# Altium PCB LMQ644_test_PCB.PcbDoc
Units mil, origin at the board's own origin, x right, y up, seen from the top; angles counter-clockwise.
Board outline 2650 x 2150 mil, 4 copper layers (1-Top, 2-GND1, 3-GND2, 4-Bottom), stack 33.556 mil thick; 61 components, 35 nets, 185 pads, 68 vias.
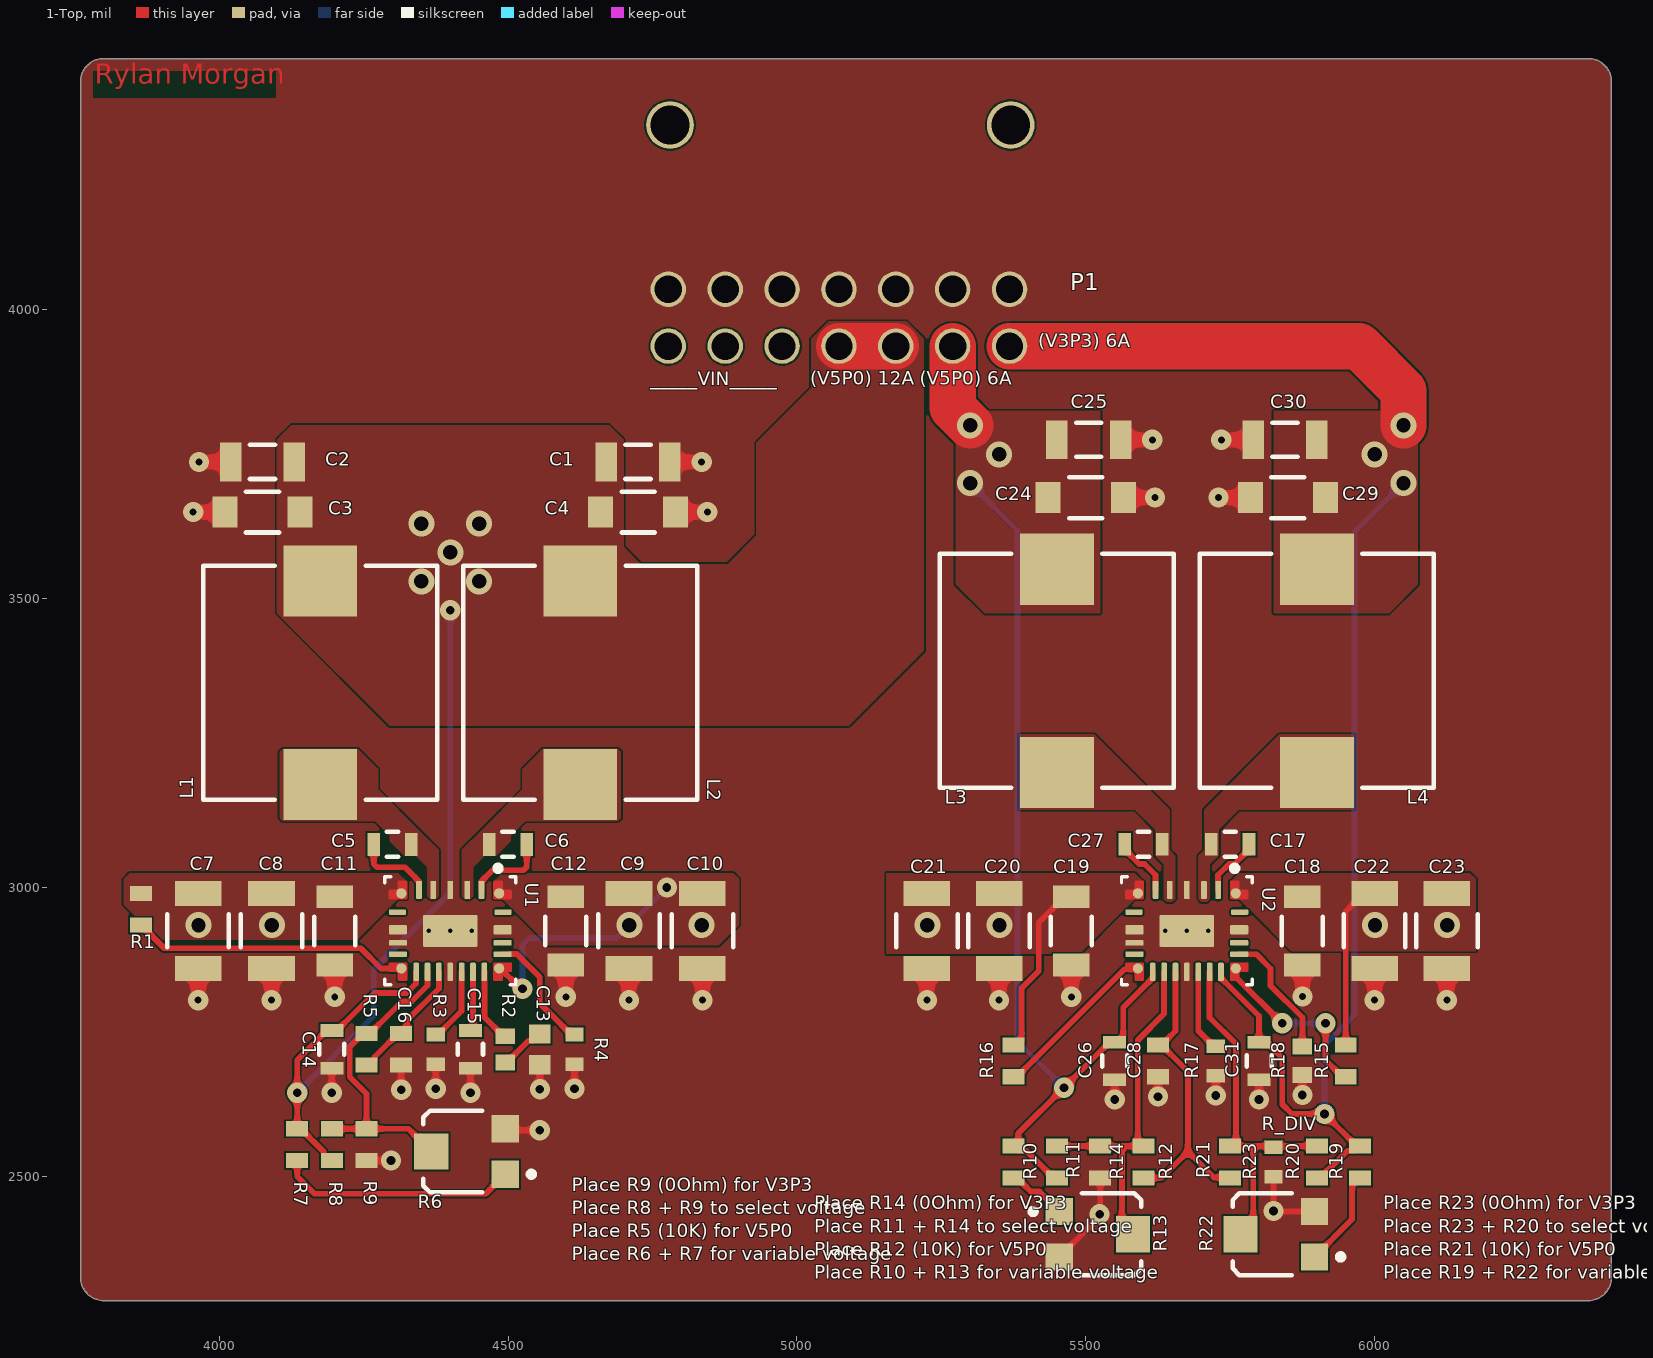
[diagram p0: 1-Top view]
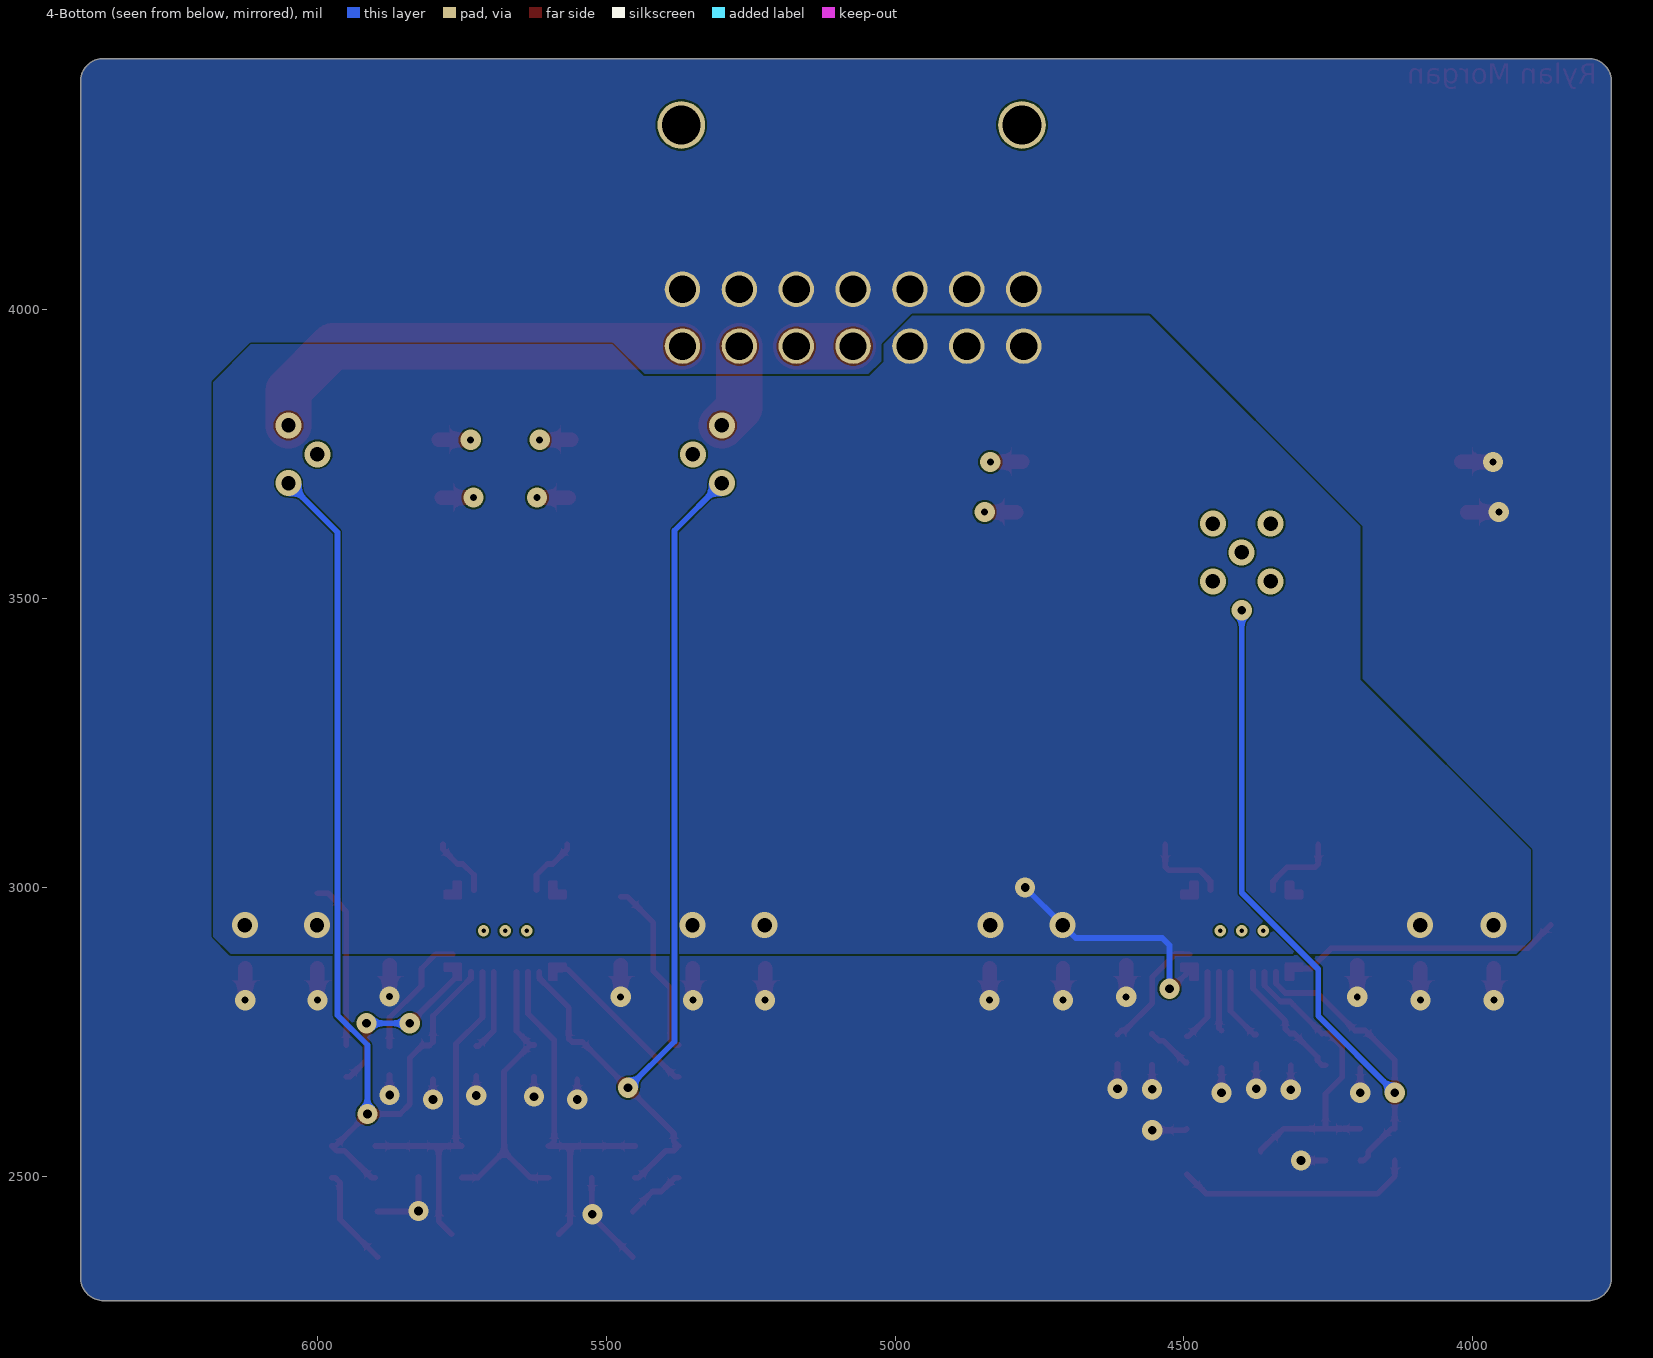
[diagram p1: 4-Bottom view, seen from below]
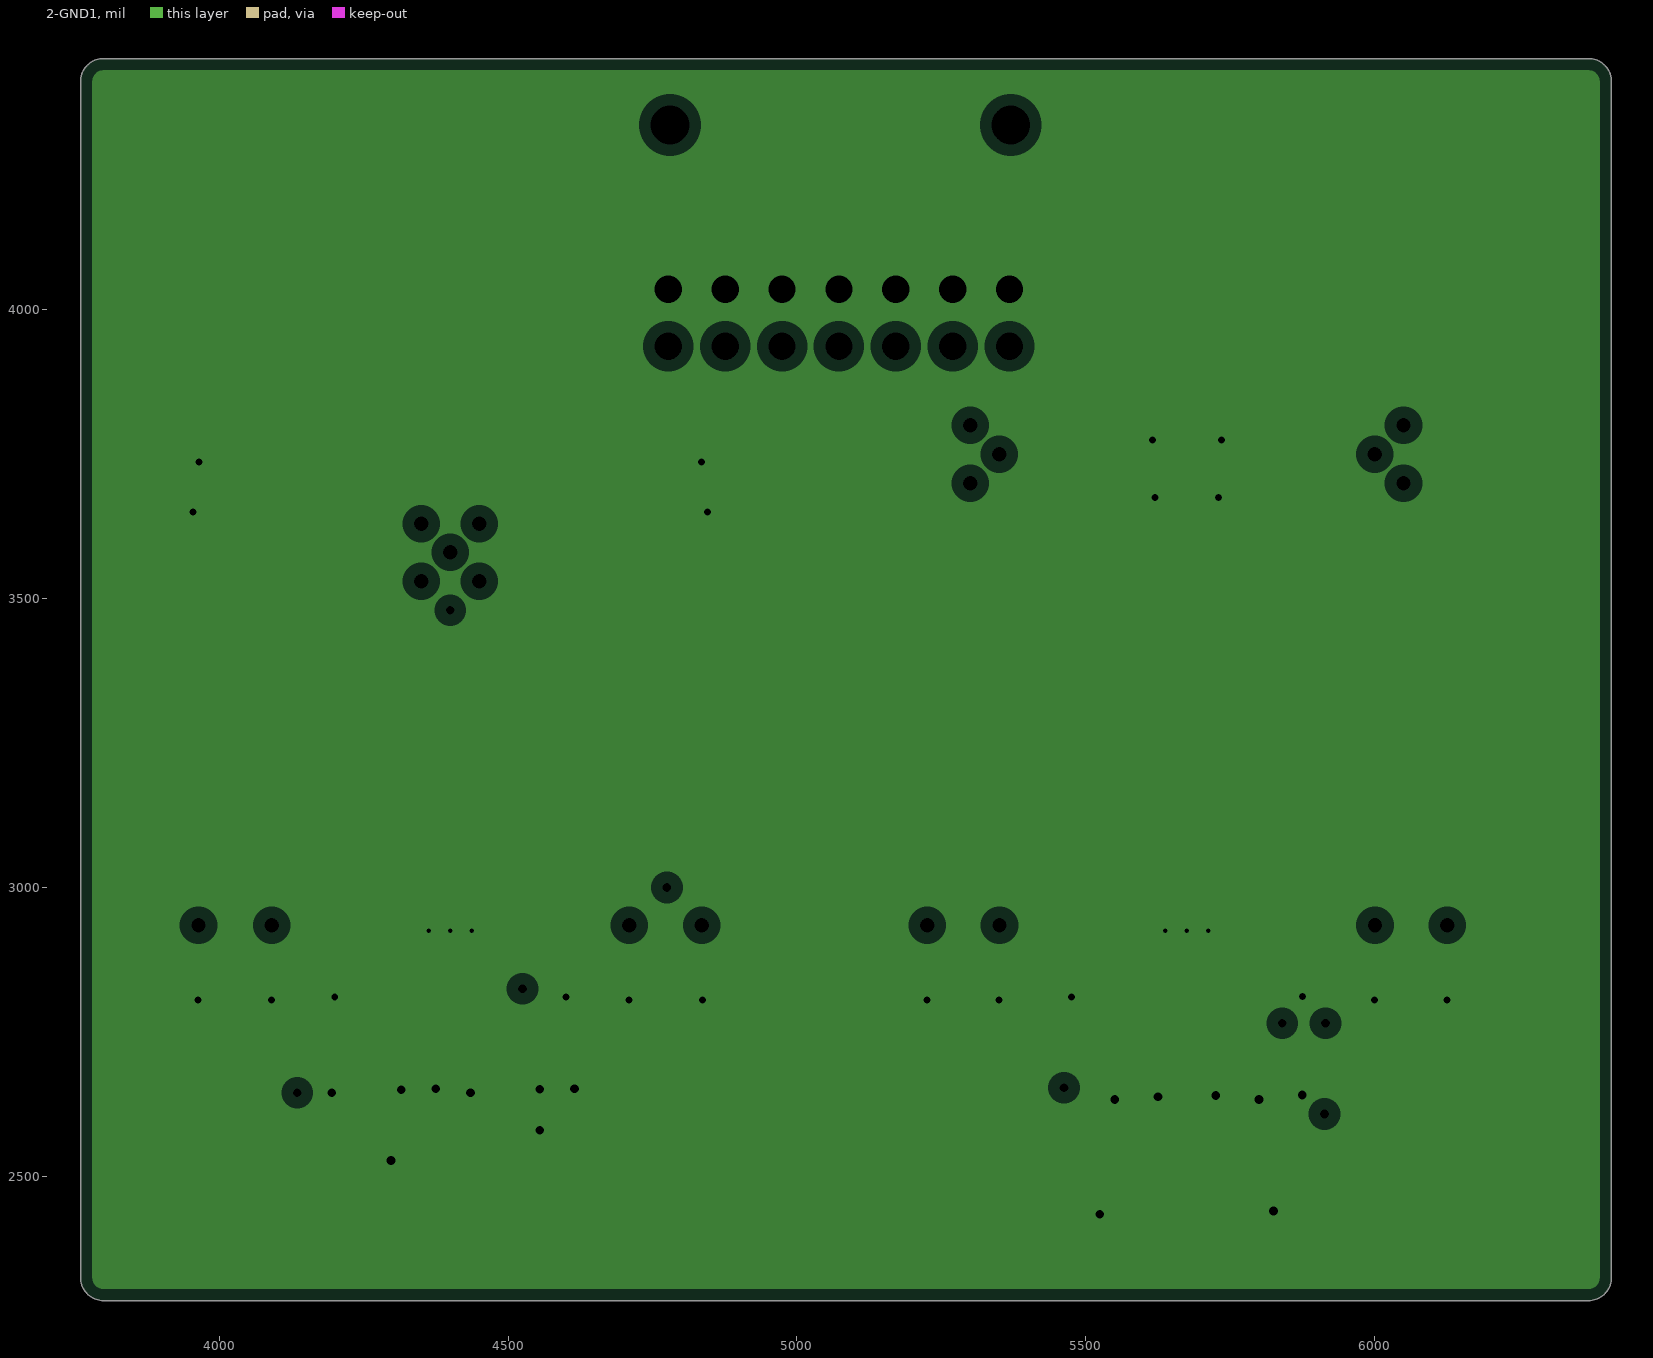
[diagram p2: 2-GND1, clearances drawn from the general rule]
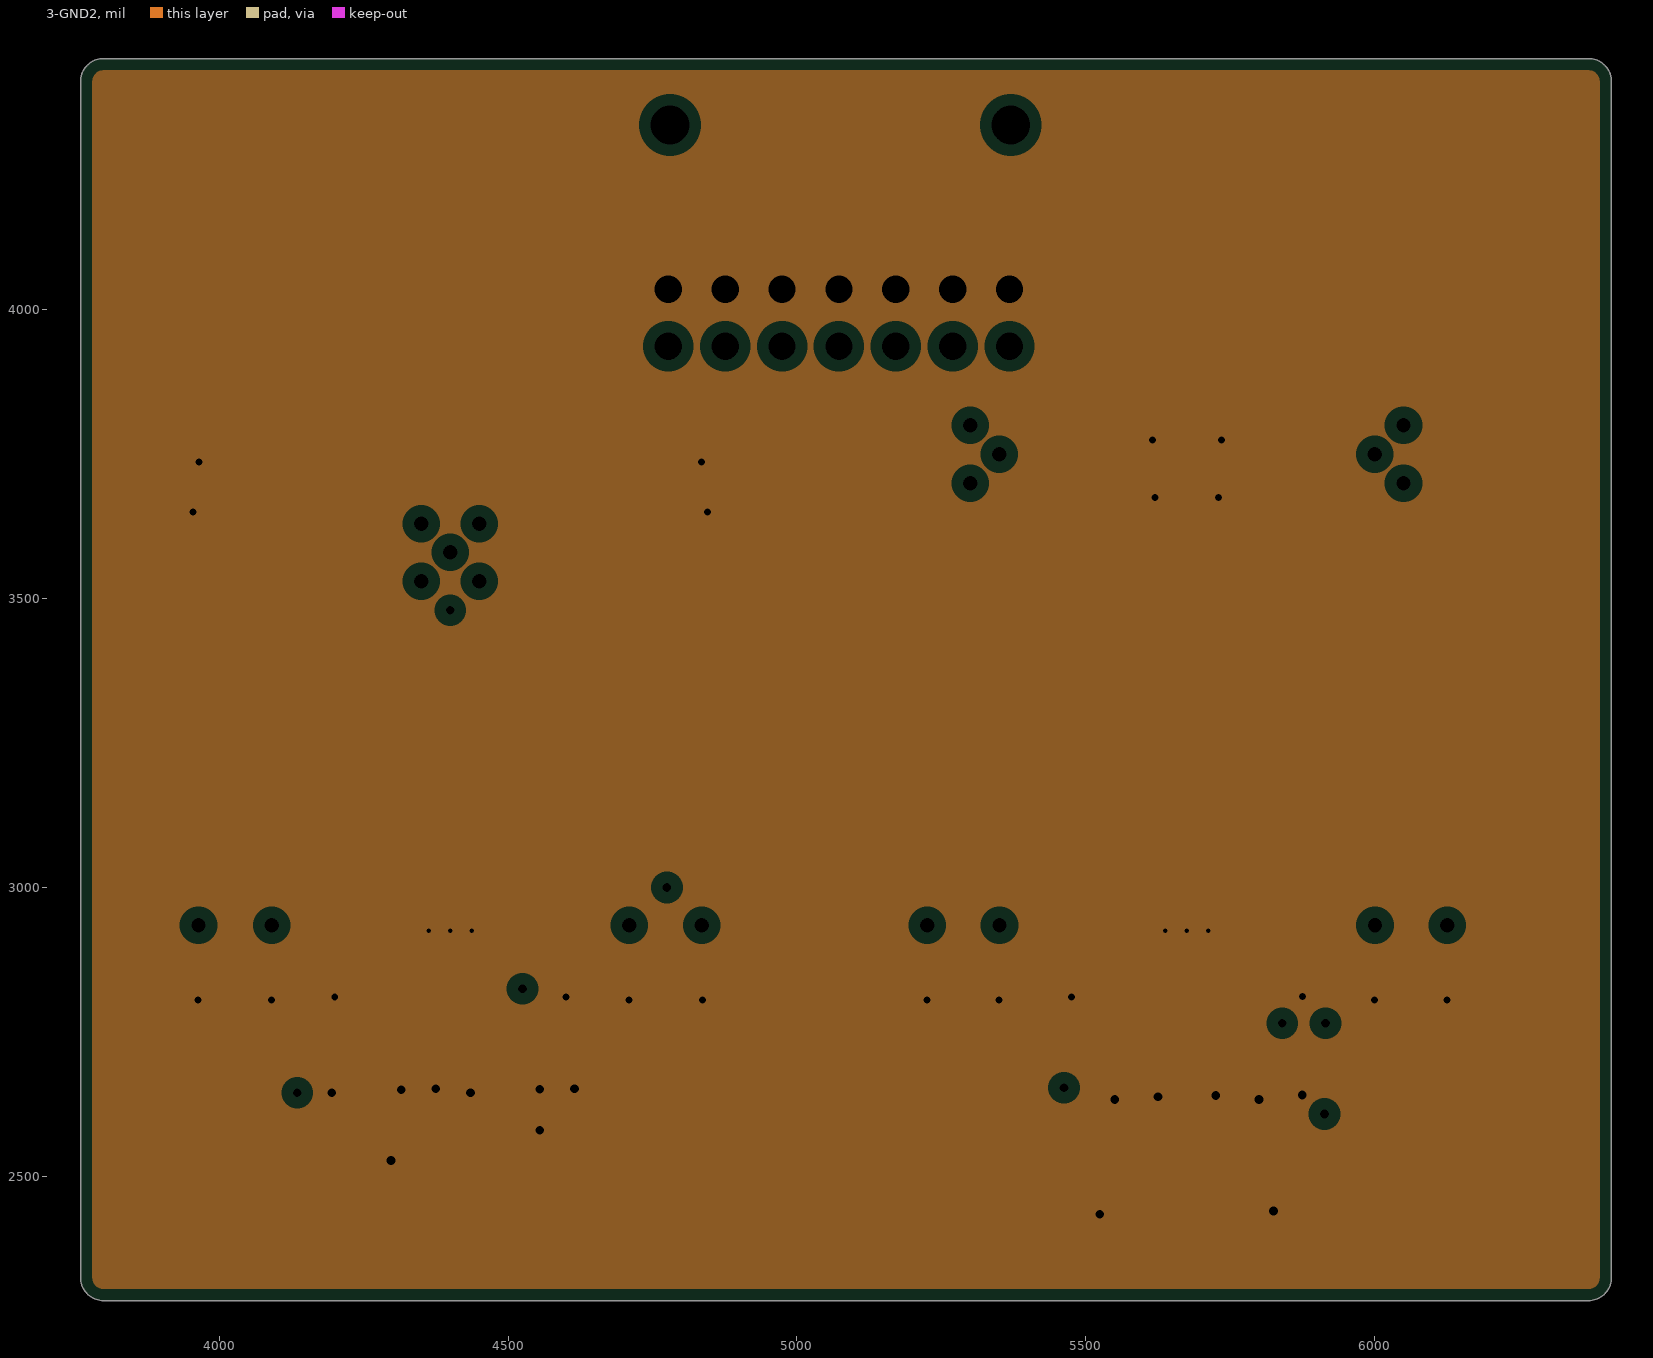
[diagram p3: 3-GND2, clearances drawn from the general rule]
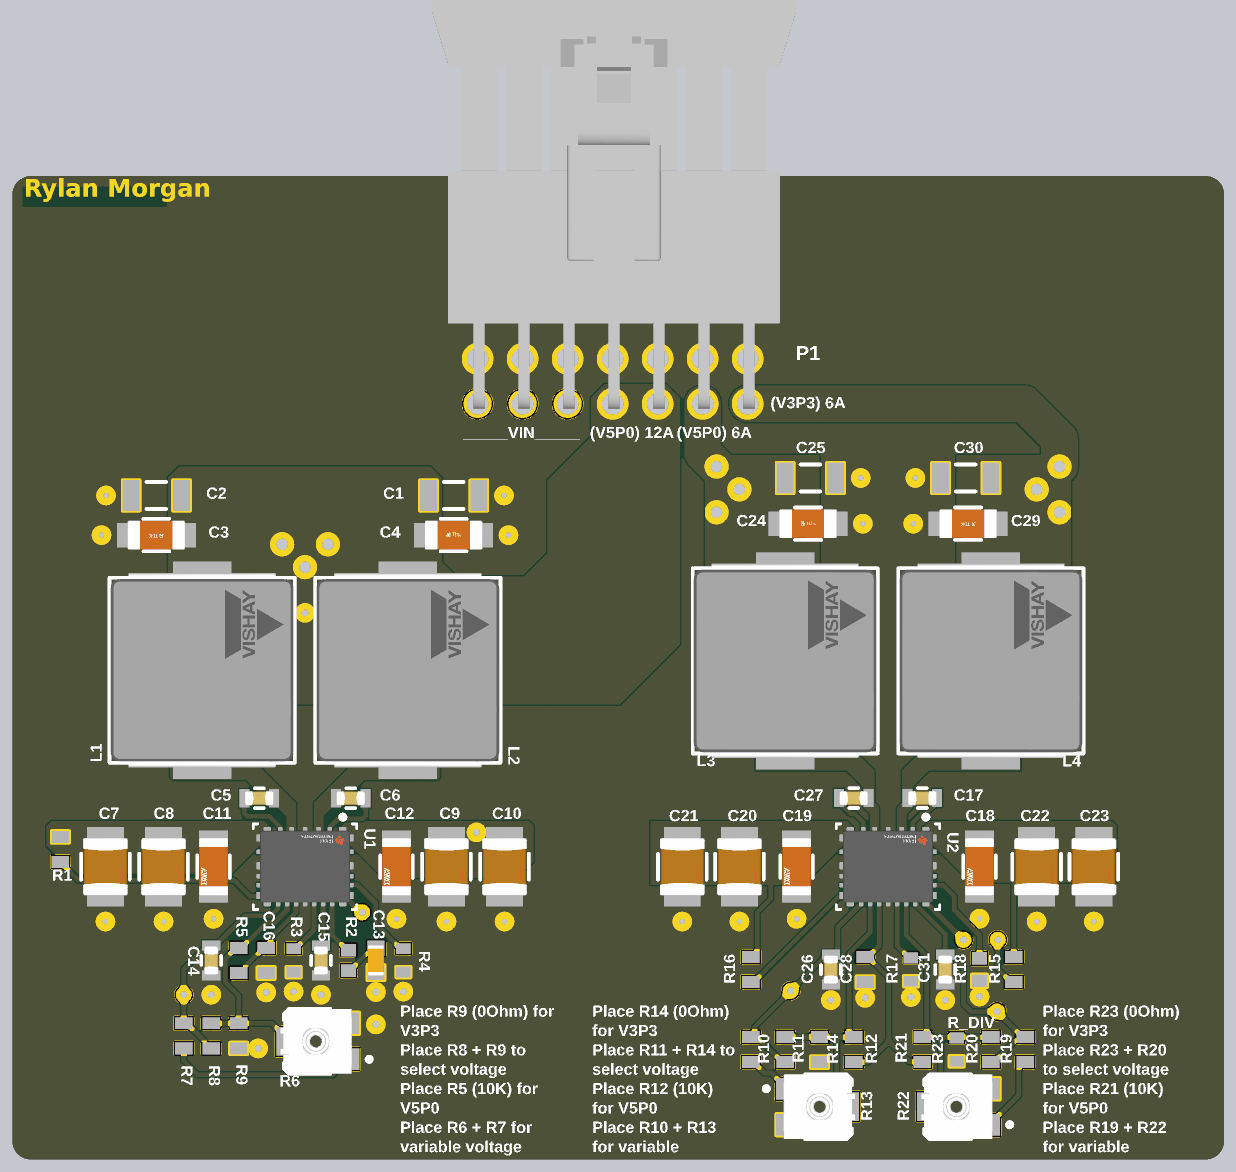
[diagram p4: 3D render of the assembled board from above, using the file's embedded part models]

## Layer stack, top to bottom
Top Solder: solder mask 0.4, Solder Resist, Dk 3.5
1-Top: signal copper 1.4
Dielectric 1: dielectric 12.6, FR-4, Dk 4.8
2-GND1: plane copper 1.378, net GND
Dielectric 2: prepreg 2.8, PP-006, Dk 4.1
3-GND2: plane copper 1.378, net GND
Dielectric3: dielectric 12.6, FR-4, Dk 4.8
4-Bottom: signal copper 1.4
Bottom Solder: solder mask 0.4, Solder Resist, Dk 3.5

## Board outline
3760,2325 3760,4395 cw(c3800,4395) 3800,4435 6370,4435 cw(c6370,4395) 6410,4395 6410,2325 cw(c6370,2325) 6370,2285 3800,2285 cw(c3800,2325)

## Design rules (kind name [scope] priority, off if disabled: settings)
Clearance Clearance_1 [All] p1: gap=3 ignorepadtopadclearanceinfootprint=FALSE except(0: Arc-Hole Track-Hole SMDPad-Hole THPad-Hole Via-Hole Fill-Hole Poly-Hole Region-Hole Text-Hole Hole-Hole)
Clearance Clearance_2 [OnMid vs OnMid] p2: gap=10 ignorepadtopadclearanceinfootprint=FALSE except(0: Arc-Hole Track-Hole SMDPad-Hole THPad-Hole Via-Hole Fill-Hole Poly-Hole Region-Hole Text-Hole)
Clearance Clearance_3 [(ExistsOnLayer('1-Top') Or ExistsOnLayer('4-Bottom')) vs (ExistsOnLayer('1-Top') Or ExistsOnLayer('4-Bottom'))] p3: gap=10 ignorepadtopadclearanceinfootprint=FALSE except(0: Arc-Hole Track-Hole SMDPad-Hole THPad-Hole Via-Hole Fill-Hole Poly-Hole Region-Hole Text-Hole)
Clearance [All] p4: gap=10 ignorepadtopadclearanceinfootprint=FALSE except(0: Arc-Hole Track-Hole SMDPad-Hole THPad-Hole Via-Hole Fill-Hole Poly-Hole Region-Hole Text-Hole)
PlaneClearance [All] p1: clearance=20
PlaneConnect [All] p1: planeconnectstyle=Relief reliefexpansion=20 reliefentries=4 reliefconductorwidth=10 reliefairgap=10
PolygonConnect [All] p1: connectstyle=Direct reliefconductorwidth=10 reliefentries=4 polygonreliefangle="90 Angle" airgapwidth=10
RoutingVias RoutingViaStyle_1 [All] p1: holewidth=15 width=35 viastyle="Through Hole" minholewidth=10 minwidth=10 maxholewidth=30 maxwidth=50
RoutingVias [All] p2: holewidth=28 width=50 viastyle="Through Hole" minholewidth=28 minwidth=50 maxholewidth=28 maxwidth=50
SolderMaskExpansion [All] p1: expansion=4 istentingtop=FALSE
Width MaxMinWidth_1 [All] p1: maxlimit=100 minlimit=10 preferedwidth=10 minimp=50.000000 maximp=50.000000 favimp=50.000000
Width [All] p2: maxlimit=10 minlimit=10 preferedwidth=10
28 further rules are at their usual default settings.

## Components (designator, comment, footprint, x,y, rotation, side; value= is the part's Value field where it differs from the comment)
C1 "22uF" CAPC1206(3216)190_L 4725,3736.7 r180 top (schematic designator C73)
C2 "22uF" CAPC1206(3216)190_L 4075,3736.7 r0 top (schematic designator C68)
C3 "47uF" FP-C3216-160-0_2-MFG 4075,3650 r180 top (schematic designator C67)
C4 "47uF" FP-C3216-160-0_2-MFG 4725,3650 r0 top (schematic designator C72)
C5 "100nF" FP-CGA3E-0_3-0_1-IPC_C 4300,3074.7 r0 top (schematic designator C16)
C6 "100nF" FP-CGA3E-0_3-0_1-IPC_C 4500,3074.7 r180 top (schematic designator C70)
C7 "10uF" FP-GRM32-MFG 3963.6,2925 r270 top (schematic designator C63)
C8 "10uF" FP-GRM32-MFG 4090.66,2925 r270 top (schematic designator C64)
C9 "10uF" FP-GRM32-MFG 4709.34,2925 r270 top (schematic designator C66)
C10 "10uF" FP-GRM32-MFG 4836.4,2925 r270 top (schematic designator C65)
C11 "100nF" FP-1206-L_3_2_0_2-W_1_6_0-MFG 4200,2925 r270 top (schematic designator C62)
C12 "100nF" FP-1206-L_3_2_0_2-W_1_6_0-MFG 4600,2925 r270 top (schematic designator C18)
C13 "2.2nF" CAPC1608X90X35NL10T15 4555.13,2720 r270 top (schematic designator C80)
C14 "100nF" FP-CGA3E-0_3-0_1-IPC_C 4195,2720 r90 top (schematic designator C69)
C15 "100nF" FP-CGA3E-0_3-0_1-IPC_C 4435,2720 r270 top (schematic designator C79)
C16 "1uF" 0603 4315,2720 r270 top (schematic designator C71)
C17 "100nF" FP-CGA3E-0_3-0_1-IPC_C 5600,3075 r0 top
C18 "100nF" FP-1206-L_3_2_0_2-W_1_6_0-MFG 5875,2925 r270 top
C19 "100nF" FP-1206-L_3_2_0_2-W_1_6_0-MFG 5475,2925 r270 top
C20 "10uF" FP-GRM32-MFG 5350,2925 r270 top
C21 "10uF" FP-GRM32-MFG 5225,2925 r270 top
C22 "10uF" FP-GRM32-MFG 6000,2925 r270 top
C23 "10uF" FP-GRM32-MFG 6125,2925 r270 top
C24 "47uF" FP-C3216-160-0_2-MFG 5500,3675 r0 top
C25 "22uF" CAPC1206(3216)190_L 5505.12,3775 r180 top
C26 "100nF" FP-CGA3E-0_3-0_1-IPC_C 5550,2700 r90 top
C27 "100nF" FP-CGA3E-0_3-0_1-IPC_C 5750,3075 r180 top
C28 "1uF" 0603 5625,2700 r270 top
C29 "47uF" FP-C3216-160-0_2-MFG 5850,3675 r180 top
C30 "22uF" CAPC1206(3216)190_L 5844.88,3775 r0 top
C31 "100nF" FP-CGA3E-0_3-0_1-IPC_C 5800,2700 r90 top
L1 "6.8uH" FP-IHLP-4040DZ-FP_3_124x3-MFG 4175,3354.61 r90 top
L2 "6.8uH" FP-IHLP-4040DZ-FP_3_124x3-MFG 4625,3354.61 r90 top (schematic designator L3)
L3 "6.8uH" FP-IHLP-4040DZ-FP_3_124x3-MFG 5450,3375 r90 top
L4 "6.8uH" FP-IHLP-4040DZ-FP_3_124x3-MFG 5900,3375 r90 top
P1 "14-Pin 2-Row Nano-Fit Right Angle" "MOLEX NANO-FIT 2X7 - Right Angle" 5368.03,4035.55 r180 top
R1 "10K" 0603 3865,2962.46 r90 top (schematic designator R5)
R2 "11K" RESC1609X50X30LL10T20 4495,2720 r270 top (schematic designator R32)
R3 "39K2" RESC1608X55X25LL10T15 4375,2720 r90 top (schematic designator R38)
R4 "56K2" RESC1608X55X25LL10T15 4615,2720 r90 top (schematic designator R42)
R5 "10K" 0603 4255,2720 r90 top (schematic designator R27)
R6 "DNP" BOUR-TC33X-2_V 4424.13,2543.13 r180 top (schematic designator R52)
R7 "DNP" 0603 4135,2555 r270 top (schematic designator R53)
R8 "DNP" 0603 4195,2555 r90 top (schematic designator R50)
R9 "DNP" 0603 4255,2555 r270 top (schematic designator R51)
R10 "DNP" 0603 5375,2525 r270 top
R11 "DNP" 0603 5450,2525 r90 top
R12 "10K" 0603 5600,2525 r90 top
R13 "DNP" BOUR-TC33X-2_V 5525,2400 r0 top
R14 "DNP" 0603 5525,2525 r270 top
R15 "10K" 0603 5950,2700 r90 top
R16 "10K" 0603 5375,2700 r90 top
R17 "39K2" RESC1608X55X25LL10T15 5725,2700 r90 top
R18 "121K" RESC1608X55X30LL15T15 5875,2700 r90 top
R19 "DNP" 0603 5975,2525 r270 top
R20 "DNP" 0603 5900,2525 r90 top
R21 "DNP" 0603 5750,2525 r270 top
R22 "DNP" BOUR-TC33X-2_V 5825,2400 r180 top
R23 "0R" RESC1608X55X25LL10T15 5825,2525 r90 top
U1 "LMQ644A2QRXARQ1" RXA0024A-MFG 4400,2925 r270 top (schematic designator U3)
U2 "LMQ644A2QRXARQ1" RXA0024A-MFG 5675,2925 r270 top

## Footprints (in the part's own frame and the unit in brackets; to place one, negate y for a bottom-side part, rotate by r counter-clockwise, add the part's x,y. Pads: shape width x height; smd on the part's side, far side on the other; paste and mask are expansions set on the pad)
0603 [mil]
  rect 26x38 smd: 1(-27.5,0) 2(27.5,0)
  body extent 0,0 10,10, height 10
BOUR-TC33X-2_V [mm] "SMD, 3-Leads, Body 3.8x3.6mm"
  rect 1.2x1.2 smd: 1(-1.8,1) 3(-1.8,-1)
  rect 1.5x1.6 smd: 2(1.45,0)
  silkscreen extent -3.08,-1.8 1.8,1.8, body extent -2,-1.8 1.96,1.8, height 1.15
CAPC1206(3216)190_L [mm] "Chip Capacitor, Body 3.2x1.6mm, Height 1.9mm, IPC High Density"
  rect 0.95x1.7 smd: 1(-1.4,0) 2(1.4,0)
  silkscreen extent -0.55,-0.75 0.55,0.75, body extent -1.7,-0.9 1.7,0.9, height 1.9
CAPC1608X90X35NL10T15 [mm] "Chip Capacitor, 2-Leads, Body 1.7x0.9mm, IPC Medium Density"
  rect 0.85x0.95 smd: 1(-0.675,0) 2(0.675,0)
  body extent -0.85,-0.45 0.85,0.45, height 0.9
FP-1206-L_3_2_0_2-W_1_6_0-MFG [mm]
  rect 1x1.6 smd paste+0 mask+0: 1(-1.5,0) 2(1.5,0)
  silkscreen extent -0.63,-0.9 0.63,0.9, body extent -2.1,-1 2.1,1, height 0.25
FP-C3216-160-0_2-MFG [mm]
  rect 1.1x1.35 smd paste+0 mask+0: 1(-1.65,0) 2(1.65,0)
  silkscreen extent -0.72,-0.9 0.72,0.9, body extent -2.3,-1 2.3,1, height 0.25
FP-CGA3E-0_3-0_1-IPC_C [mm]
  rect 0.556x1.006 smd paste+0 mask+0: 1(-0.825,0) 2(0.825,0)
  silkscreen extent -0.25,-0.55 0.25,0.55, body extent -1.2,-0.65 1.2,0.65, height 0.25
FP-GRM32-MFG [mm]
  rect 1.1x2.05 smd paste+0 mask+0: 1(-1.65,0) 2(1.65,0)
  silkscreen extent -0.72,-1.35 0.72,1.35, body extent -2.3,-1.45 2.3,1.45, height 0.25
FP-IHLP-4040DZ-FP_3_124x3-MFG [mil]
  rect 122.99x127.99 smd paste+0 mask+0: 1(-176,0) 2(176,0)
  silkscreen extent -202,-202 202,202, body extent -241,-206 241,206, height 10
"MOLEX NANO-FIT 2X7 - Right Angle" [mm]
  round 1.56 hole 1.2: 1(15,2.5) 2(12.5,2.5) 3(10,2.5) 4(7.5,2.5) 5(5,2.5) 6(2.5,2.5) 7(0,2.5) 8(15,0) 9(12.5,0) 10(10,0) 11(7.5,0) 12(5,0) 13(2.5,0) 14(0,0)
  round 2.1 hole 1.7: ""(-0.05,-7.225) ""(14.925,-7.225)
  body extent -2.68,-26.05 17.53,2.78, height 10.21
RESC1608X55X25LL10T15 [mm] "Chip Resistor, 2-Leads, Body 1.60x0.80mm, IPC High Density"
  rect 0.6x0.8 smd: 1(-0.65,0) 2(0.65,0)
  body extent -0.85,-0.45 0.85,0.45, height 0.55
RESC1608X55X30LL15T15 [mm] "Chip Resistor, 2-Leads, Body 1.60x0.80mm, IPC High Density"
  rect 0.7x0.85 smd: 1(-0.625,0) 2(0.625,0)
  body extent -0.87,-0.48 0.87,0.48, height 0.55
RESC1609X50X30LL10T20 [mm] "Chip Resistor, 2-Leads, Body 1.55x0.85mm, IPC High Density"
  rect 0.7x0.85 smd: 1(-0.575,0) 2(0.575,0)
  body extent -0.82,-0.48 0.82,0.48, height 0.5
RXA0024A-MFG [mm]
  round 0.45 smd paste+0 mask+0: 1(-1.65,2.15) 7(-1.65,-2.15) 12(1.65,-2.15) 20(1.65,2.15)
  rrect40% 0.8x0.25 smd paste+0 mask+0: 2(-1.8,1.375) 3(-1.8,0.75) 4(-1.8,0) 5(-1.8,-0.75) 6(-1.8,-1.375) 13(1.8,-1.5) 14(1.8,-1) 15(1.8,-0.5) 16(1.8,0) 17(1.8,0.5) 18(1.8,1) 19(1.8,1.5)
  rrect40% 0.25x0.75 smd paste+0 mask+0: 8(-0.825,-2.325) 24(-0.825,2.325)
  rrect25% 0.4x0.8 smd paste+0 mask+0: 9(-0.05,-2.3) 23(-0.05,2.3)
  rrect40% 0.25x0.8 smd paste+0 mask+0: 10(0.525,-2.3) 11(1.025,-2.3) 21(1.025,2.3) 22(0.525,2.3)
  rrect7% 1.4x2.4 smd paste-1000 mask+0: 25(0,0)
  1-Top region: -2.2,-2.25 -2.196,-2.269 -2.185,-2.285 -2.169,-2.296 -2.15,-2.3 -2.15,-2.3 -1.9,-2.3 -1.862,-2.308 -1.829,-2.329 -1.808,-2.362 -1.8,-2.4 -1.8,-2.4 -1.8,-2.65 -1.793,-2.675 -1.775,-2.693 -1.75,-2.7 -1.75,-2.7 -1.45,-2.7 -1.425,-2.693 -1.407,-2.675 -1.4,-2.65 -1.4,-2.65 -1.4,-1.95 -1.404,-1.931 -1.415,-1.915 -1.431,-1.904 -1.45,-1.9 -1.45,-1.9 -2.15,-1.9 -2.169,-1.904 -2.185,-1.915 -2.196,-1.931 -2.2,-1.95 -2.2,-1.95
  1-Top region: 2.2,2.25 2.196,2.269 2.185,2.285 2.169,2.296 2.15,2.3 2.15,2.3 1.9,2.3 1.862,2.308 1.829,2.329 1.808,2.362 1.8,2.4 1.8,2.4 1.8,2.65 1.793,2.675 1.775,2.693 1.75,2.7 1.75,2.7 1.45,2.7 1.425,2.693 1.407,2.675 1.4,2.65 1.4,2.65 1.4,1.95 1.404,1.931 1.415,1.915 1.431,1.904 1.45,1.9 1.45,1.9 2.15,1.9 2.169,1.904 2.185,1.915 2.196,1.931 2.2,1.95 2.2,1.95
  1-Top region: 2.2,-2.25 2.196,-2.269 2.185,-2.285 2.169,-2.296 2.15,-2.3 2.15,-2.3 1.9,-2.3 1.862,-2.308 1.829,-2.329 1.808,-2.362 1.8,-2.4 1.8,-2.4 1.8,-2.65 1.793,-2.675 1.775,-2.693 1.75,-2.7 1.75,-2.7 1.45,-2.7 1.425,-2.693 1.407,-2.675 1.4,-2.65 1.4,-2.65 1.4,-1.95 1.404,-1.931 1.415,-1.915 1.431,-1.904 1.45,-1.9 1.45,-1.9 2.15,-1.9 2.169,-1.904 2.185,-1.915 2.196,-1.931 2.2,-1.95 2.2,-1.95
  1-Top region: -2.2,2.25 -2.193,2.275 -2.175,2.293 -2.15,2.3 -2.15,2.3 -1.9,2.3 -1.862,2.308 -1.829,2.329 -1.808,2.362 -1.8,2.4 -1.8,2.4 -1.8,2.65 -1.793,2.675 -1.775,2.693 -1.75,2.7 -1.75,2.7 -1.45,2.7 -1.425,2.693 -1.407,2.675 -1.4,2.65 -1.4,2.65 -1.4,1.95 -1.404,1.931 -1.415,1.915 -1.431,1.904 -1.45,1.9 -1.45,1.9 -2.15,1.9 -2.169,1.904 -2.185,1.915 -2.196,1.931 -2.2,1.95 -2.2,1.95
  silkscreen extent -2.87,-2.88 2.37,2.88, body extent -2.3,-2.8 2.3,2.8, height 0.25

## Part data
C1 C2 C25 C30: library part CMP-1037-04986-1, "CAP 22uF 6.3V ±20% 1206 (3216 Metric) Thickness 1.9mm SMD", Case-EIA=1206, Case-Metric=3216, Rated Voltage="6.3 V", Tolerance=Â±20%, Max Thickness="1.9 mm", Technology=SMT
C3 C4 C24 C29: library part CMP-2000-07442-2, "Multilayer Ceramic Capacitors 47uF ±20% 16V X5R SMD 1206 / C3216X5R1C476M160AB", Case Code (Imperial)=1206, Case Code (Metric)=3216, Dielectric=X5R, Dielectric Material=Ceramic, Max Operating Temperature=85°C, Min Operating Temperature=-55°C, Package Quantity=1, Tolerance=20%, Voltage Rating=16V, Capacitance=47uF, Case/Package=1206, Construction=Flat, Depth=1.6mm, Height=1.6mm, Lead Free="Lead Free", Length=3.2mm, Mount="Surface Mount", Packaging="Tape and Reel", Radiation Hardening=No, REACH SVHC="No SVHC", Resistor Type=Ceramic, RoHS Compliant=Yes, Series=C, Termination=SMD/SMT, Thickness=0.071inch, Voltage Rating (DC)=16V, Weight=0.000571oz, Width=0.063inch
C5 C6 C14 C15 C17 C26 C27 C31: library part CMP-2000-07546-2, "Cap Ceramic 100nF 50V X7R 10% Pad SMD 0603 +125°C Automotive T/R / CGA3E2X7R1H104K080AA", Case Code (Imperial)=0603, Case Code (Metric)=1608, Dielectric=X7R, Max Operating Temperature=125°C, Min Operating Temperature=-55°C, Package Quantity=1, Ratings=AEC-Q200, Tolerance=10%, VOLTAGE=50V, Capacitance=100nF, Case/Package=0603, Composition=Ceramic, Depth=0.8mm, Height=0.8mm, Lead Free="Lead Free", Length=1.6mm, Mount="Surface Mount", Packaging="Tape and Reel", Radiation Hardening=No, REACH SVHC="No SVHC", Termination=SMD/SMT, Thickness=0.035inch, Voltage Rating=50V, Voltage Rating (DC)=50V, Weight=7.1E-05oz, Width=0.8mm
C7 C8 C9 C10 C20 C21 C22 C23: library part CMP-2000-05261-2, "CAP CER 10UF 50V X7R 1210", Manufacturer=Murata, Manufacturer Part Number=GRM32ER71H106KA12L, Package=GRM32, Temperature="-55°C to +125°C", Temperature Characteristic=X7R, Temperature Coefficient=15%, Temperature Range High=+125°C, Temperature Range Low=-55°C, Tolerance=10%, Voltage Rating=50V, Automotive=No, Capacitance=10uF, Category=Cap, ComponentLink2Description=Datasheet, ComponentLink2URL=https://search.murata.co.jp/Ceramy/image/img/A01X/G101/ENG/GRM32ER71H106KA12-01.pdf, Device Class L1="Passive Components", Device Class L2=Capacitors, Device Class L3="Ceramic Capacitors", Digikey Description="CAP CER 10UF 50V X7R 1210", Height=2.7mm, Lead Free=Yes, Material=Ceramic, Mouser Description="1210 10 uF 50 V ±10% Tolerance X7R SMT Multilayer Ceramic Capacitor", Octopart=https://octopart.com/grm32er71h106ka12l-murata-10470987, RoHS=TRUE
C11 C12 C18 C19: library part CMP-04427-006943-1, "General Purpose Ceramic Capacitor, 1206, 10uF, 20%, X5R, 15%, 25V / 12063D106MAT2A", Capacitance=10uF, Case Code (Imperial)=1206, Case Code (Metric)=3216, Dielectric=X5R, Insulation Resistance=10GR, Max Operating Temperature=85°C, Min Operating Temperature=-55°C, Package Quantity=1, Tolerance=20%, Voltage Rating=25V, Case/Package=1206, Construction=Flat, Contact Plating=Tin, Depth=1.6mm, Dissipation Factor=12.5%, Height=0.07mm, Lead Free="Lead Free", Length=3.2mm, Mount="Surface Mount", Number of Pins=2, Packaging="Tape and Reel", Radiation Hardening=No, REACH SVHC="No SVHC", RoHS Compliant=Yes, Series=-, Termination=SMD/SMT, Thickness=0.07inch, Voltage Rating (DC)=25V, Width=1.6mm
C13: library part CMP-2006-02908-5, "Chip Capacitor, 2.2 nF, +/- 10%, 50 V, -55 to 125 degC, 0603 (1608 Metric), RoHS, Tape and Reel / GRM188R71H222KA01D", Manufacturer=Murata, Max Operating Temperature="125 degC", Min Operating Temperature="-55 degC", Package Quantity=4000, Voltage Rating="50 V", ComponentLink1Description="Manufacturer URL", ComponentLink1URL=http://www.murata.com/, ComponentLink2Description=Datasheet, ComponentLink2URL=http://search.murata.co.jp/Ceramy/image/img/A01X/G101/ENG/GRM188R71H222KA01-01.pdf, DatasheetVersion=02/2016, Height="0.8 mm", Lead Pitch="4 mm", Length="1.6 mm", Mount="Surface Mount", Mounting Technology="Surface Mount", PackageDescription="2-Pin Surface Mount Device, Body 1.6 x 0.8 mm", PackageReference=0603, Packaging="Tape and Reel", Pins=2, REACH SVHC="No SVHC", RoHSCompliant=true
C16 C28: library part "1uF 0603", "CAP 1uF 25V ±10% 0603 (1608 Metric) Thickness 1mm SMD", Case-EIA=0603, Case-Metric=1608, Rated Voltage="25 V", Tolerance=Â±10%, ComponentLink1Description=Link, ComponentLink1URL=https://www.digikey.com/en/products/detail/samsung-electro-mechanics/CL10B105KA8NNNC/3886842, Max Thickness="1 mm", Technology=SMT
L1 L2 L3 L4: library part CMP-02424-000228-1, "Commercial Inductors, High Saturation Series 6.8uH 8A 23.3mΩ 20%", Case/Package=4040, Current Rating=8A, DC Resistance (DCR)=23.3mR, Inductance Tolerance=20%, Max DC Current=13.5A, Max Operating Temperature=125°C, Min Operating Temperature=-55°C, Package Quantity=500, Self Resonant Frequency=5MHz, Test Frequency=100kHz, Contact Plating=Tin, Core Material=Metal, Depth=10.3mm, Height=4mm, Height - Seated (Max)=0.157inch, Inductance=6.8uH, Lead Free="Lead Free", Length=0.43inch, Military Standard=Not, Mount="Surface Mount", Number of Pins=4040, Packaging="Tape and Reel", Radiation Hardening=No, RMS Current (Irms)=8A, Saturation Current=13.5A, Shielding=Shielded, Termination=SMD/SMT, Tolerance=20%, Width=0.405inch
P1: "NanoFit Right Hdr TH DR 14Ckt", Manufacturer=Molex, Part Number=105314-1214, Supplier Part Number=538-105314-1214, ComponentLink1Description="Mouser Link", ComponentLink1URL=https://www.mouser.com/ProductDetail/Molex/105314-1214?qs=PqFvFmEiOr6wLIXpvlvqbA%3D%3D, ComponentLink2Description=Link, ComponentLink2URL=https://www.digikey.com/en/products/detail/molex/1053141114/7693193, Supplier=Mouser, Supplier 1=Mouser, Supplier Part Number 1=538-105314-1214
R1 R5 R7 R10 R12 R15 R16 R19: library part "10K 0603", "Chip Resistor, 10 KOhm, +/- 1%, 100 mW, -55 to 155 degC, 0603 (1608 Metric), RoHS, Tape and Reel", Manufacturer="Vishay Semiconductor", Max Operating Temperature="155 degC", Min Operating Temperature="-55 degC", Package Quantity=5000, Voltage Rating="75 V", ComponentLink1Description="Manufacturer URL", ComponentLink1URL=http://www.vishay.com/, ComponentLink2Description=Datasheet, ComponentLink2URL=https://datasheet.ciiva.com/11809/0900766b80d98afc-11809037.pdf, ComponentLink3Description=Link, ComponentLink3URL=https://www.digikey.com/en/products/detail/stackpole-electronics-inc/RNCP0603FTD10K0/2240139, DatasheetVersion=06/2012, Height="0.45 mm", Length="1.55 mm", Mounting Technology="Surface Mount", PackageDescription="2-Pin Surface Mount Device, Body 1.575 x 0.85 mm", PackageReference=0603, Packaging="Tape and Reel", REACH SVHC=Unknown, RoHSCompliant=true
R2: library part CMP-2000-03860-1, "CRCW060311K0FKEA / 11K 0603", Manufacturer="Vishay Dale", Part Number=CRCW060311K0FKEA
R3 R17: library part CMP-2000-04034-1, "RC0603FR-0739K2L / 0603 39.2k", Manufacturer=Yageo, Part Number=RC0603FR-0739K2L
R4: library part CMP-1659-00050-1, "Chip Resistor, 56.2 KOhm, +/- 1%, 0.1 W, -55 to 155 degC, 0603 (1608 Metric), RoHS, Tape and Reel / RC0603FR-0756K2L", Colour=Black, Current Rating="1 A", Max Operating Temperature="50 degC", Min Operating Temperature="0 degC", Package Quantity=24000, Voltage Rating="30 V", ComponentLink1Description="Manufacturer URL", ComponentLink1URL=http://www.yageo.com/, ComponentLink2Description=Datasheet, ComponentLink2URL=http://www.yageo.com/documents/recent/PYu-RC_Group_51_RoHS_L_04.pdf, Connector Type=USB, Contact Material=Copper, Contact Plating=Gold, DatasheetVersion="Rev. 4, 02/2016", Gender=Female, Height="15 mm", Length="14.5 mm", Mount="Through Hole", PackageDescription="2-Pin Surface Mount Device, Body 1.6 x 0.8 mm", PackageReference=0603, Packaging=Tray, Pins=4, Radiation Hardening=No, REACH SVHC=Unknown, RoHSCompliant=true, Width="7.12 mm"
R6 R13 R22: library part CMP-2100-03695-1, "Trimming Potentiometer, 10000 Ohm, -40 to 100 degC, 3-Pin SMD, RoHS, Tape and Reel / TC33X-2-103E", Case/Package=SMD/SMT, Colour=Silver, Manufacturer=Bourns, Max Operating Temperature=100degC, Max Power Dissipation=100mW, Min Operating Temperature=-40degC, Package Description="3-Pin Surface Mount Device, Body 3.8 x 3.6 mm", Package Quantity=2500, Package Reference=TC33X-2, Resistance=10KOhm, Temperature Coefficient=250ppm/degreesC, Tolerance=25%, Voltage Rating (DC)=50V, Composition=Potentiometer, Contact Plating=Silver, Datasheet URL=http://www.bourns.com/docs/Product-Datasheets/TC33.pdf, Datasheet Version=42583.0, Depth=3.8mm, Height=0.047inch, Lead Free=LeadFree, Length=3mm, Manufacturer URL=http://www.bourns.com/, Military Standard=Not, Mount=SurfaceMount, Number of Turns=1, Packaging=TapeandReel, Power Rating=100mW, Radiation Hardening=No, REACH SVHC=NoSVHC, RoHSCompliant=true, Taper=Linear, Termination=FootPrint, Weight=29.4mg, Width=0.118inch
R8 R9 R11 R14 R20 R21: library part "DNP 0603 R", "DNP 0603 Resistor", Case-EIA=0603, Case-Metric=1608
R18: library part CMP-2000-00221-1, "0603 121K / ERJ-3EKF1213V", Manufacturer=Panasonic, Part Number=ERJ-3EKF1213V
R23: library part CMP-2100-03667-1, "Chip Resistor, 0 Ohm, +/- 5%, 0.1 W, -55 to 155 degC, 0603 (1608 Metric), RoHS, Tape and Reel / RC0603JR-070RL", Case Code (Imperial)=0603, Case Code (Metric)=1608, Manufacturer=Yageo, Max Operating Temperature=155degC, Min Operating Temperature=-55degC, Package Description="2-Pin Surface Mount Device, Body 1.6 x 0.8 mm", Package Quantity=5000, Power Rating=100mW, Resistance=0mOhm, Temperature Coefficient=200ppm/degreesC, Tolerance=5%, Voltage Rating=50V, Case/Package=0603, Composition=ThickFilm, Contact Plating=Tin, Datasheet URL=http://www.yageo.com/NewPortal/yageodocoutput?fileName=/pdf/R-Chip/PYu-RC_Group_51_RoHS_L_5.pdf, Datasheet Version="Rev. 5, 10/2016", Depth=0.8mm, Height=0.45mm, Lead Free=LeadFree, Length=1.6mm, Manufacturer URL=http://www.yageo.com/, Military Standard=Not, Number of Pins=2, Package Reference=0603, Packaging=TapeandReel, Radiation Hardening=No, REACH SVHC=NoSVHC, RoHSCompliant=true, Termination=SMD/SMT, Voltage Rating (DC)=50V, Width=0.8mm
U1 U2: library part SYM-LMQ644A2QRXARQ1, "LMQ644A2-Q1 3-V to 36-V, 12A, Low Iq dual buck converter", Manufacturer="Texas Instruments", Max Supply Voltage=36V, Min Supply Voltage=3V, Nominal Supply Current=9-25uA, Operating Temperature Range="-40°C to +150°C", Output Voltage=0.8-20V, Switching Frequency=0.1-2.2MHz, AEC Grade="Grade 1", AEC Qualified=Yes, Datasheet Path=datasheets/IC-LMQ644A2QRXARQ1.pdf, helpURL=https://upverter.com/upn/revision/84824370b23b6079/, Max Duty Cycle=99%, Number of Outputs=2, Output Type=Fixed,AdjustableProgrammable, PackageReference=WQFN-FCRLF24, Part Number=LMQ644A2QRXARQ1, PartNumber=LMQ644A2QRXARQ1, RoHS=UNKNOWN, SizeZ_mm=0.7mm, Standoff Height=0mm, Switching Topology=Buck, TaMax_C=+125°C, TaMin_C=-40°C, TJmax_C=+150°C

## Via types
v1: diameter 35, hole 15, 1-Top to 4-Bottom, 23 vias
v2: diameter 35, hole 12, 1-Top to 4-Bottom, 20 vias
v3: diameter 45, hole 25, 1-Top to 4-Bottom, 19 vias
v4: diameter 19.68, hole 7.87, 1-Top to 4-Bottom, 6 vias

## Nets (pads, with @x,y where several pads share a name; then routed paths per layer and width w, separated by ;. In a path a pad name is that pad's centre, name@x,y a point inside that pad or via, vN(x,y) a via of type N, cw(c..) or ccw(c..) an arc to the next point about the centre after c; other vN are vias at no path point)
GND: C1.1 C2.1 C3.2 C4.2 C7.2 C8.2 C9.2 C10.2 C11.2 C12.2 C13.2 C14.1 C15.2 C16.2 C18.2 C19.2 C20.2 C21.2 C22.2 C23.2 C24.2 C25.1 C26.1 C28.2 C29.2 C30.1 C31.1 P1.8 P1.9 P1.10 P1.11 P1.12 P1.13 P1.14 R3.1 R4.1 R6.3 R9.2 R13.3 R14.2 R17.1 R18.1 R22.3 R23.1 U1.4 U1.9 U1.10 U1.16 U1.23 U1.25 U2.4 U2.9 U2.10 U2.16 U2.23 U2.25 | length 1924.9
  1-Top w10: v1(4195,2645) C14.1 ; R9.2 v1(4297.52,2527.5) ; v1(4315,2649.98) C16.2 ; v1(4375,2651.89) R3.1 ; v1(4435,2645) C15.2 ; R6.3 4497.5,2580 v1(4555,2580) ; v1(4555.13,2650.91) C13.2 ; v1(4615,2651.89) R4.1 ; R13.3 5525,2431.5 R14.2 ; v1(5550,2633.11) C26.1 ; v1(5625,2638.09) C28.2 ; v1(5725,2640) R17.1 ; v1(5800,2633.11) C31.1 ; R23.1@5824.88,2499.29 5824.88,2445.23 5830.74,2439.37 R22.3 ; v1(5875,2640.98) R18.1
  1-Top w25: v2(3955,3650) C3.2 ; v2(3963.6,2805) C7.2 ; v2(3964.84,3736.7) C2.1 ; v2(4090.66,2805) C8.2 ; v2(4200,2810.91) C11.2 ; v2(4600,2810.91) C12.2 ; v2(4709.34,2805) C9.2 ; C1.1 v2(4835.16,3736.7) ; C4.2 v2(4845,3650) ; v2(4836.4,2805) C10.2 ; v2(5225,2805) C21.2 ; v2(5350,2805) C20.2 ; v2(5475,2810.91) C19.2 ; C25.1 v2(5615.28,3775) ; C24.2 v2(5620,3675) ; v2(5730,3675) C29.2 ; v2(5734.72,3775) C30.1 ; v2(5875,2811.26) C18.2 ; v2(6000,2805) C22.2 ; v2(6125,2805) C23.2
  other v1: 5524.01,2434.52 5825,2440
  other v4: 4362.6,2925 4400,2925 4437.4,2925 5637.6,2925 5675,2925 5712.4,2925
NetC5_1: C5.1 U1.6 | length 139.7
  1-Top w10: C5.1 4267.52,3040.86 4273.38,3035 4321.87,3035 4345.79,3011.08 4345.79,2995.94 U1.6
NetC5_2: C5.2 L1.1 U1.5
NetC6_1: C6.1 U1.2 | length 142.6
  1-Top w10: U1.2 4454.21,2995.94 4454.21,3011.08 4473.13,3030 4526.62,3030 4532.48,3035.86 C6.1
NetC6_2: C6.2 L2.1 U1.3
NetC13_1: C13.1 R2.2 | length 80.5
  1-Top w10: R2.2 4497.95,2697.36 4535.43,2734.84 4543.4,2734.84 C13.1
NetC17_1: C17.1 U2.6 | length 106.4
  1-Top w10: C17.1 5567.52,3066.14 5592.74,3040.92 5601.6,3040.92 5620.87,3021.65 U2.6
NetC17_2: C17.2 L3.1 U2.5
NetC27_1: C27.1 U2.2 | length 106.4
  1-Top w10: U2.2 5729.13,3021.65 5748.4,3040.92 5757.26,3040.92 5782.48,3066.14 C27.1
NetC27_2: C27.2 L4.1 U2.3
NetR2_1: R2.1 U1.19 | length 128.1
  1-Top w10: U1.19 4459.06,2775.63 4492.05,2742.64 R2.1
NetR3_2: R3.2 U1.17 | length 129.4
  1-Top w10: R3.2 4378.94,2745.59 4419.69,2786.34 U1.17
NetR4_2: R4.2 U1.21 | length 208.9
  1-Top w10: U1.21 4501.22,2884.65 4501.57,2885 4515,2885 4555,2845 4555,2799.72 4602.31,2752.4 4608.19,2752.4 R4.2
NetR6_1: R6.1 R7.2 | length 413.9
  1-Top w10: R7.2 4135,2500 4165,2470 4461.24,2470 R6.1
NetR10_2: R10.2 R13.1 | length 103.2
  1-Top w10: R10.2 5381,2497.5 5404.75,2473.75 5419.76,2473.75 R13.1
NetR17_2: R17.2 U2.17 | length 143.4
  1-Top w10: U2.17 5694.69,2751.97 5721.06,2725.59 R17.2
NetR18_2: R18.2 U2.21 | length 222.8
  1-Top w10: U2.21 5795.35,2884.65 5820,2860 5820,2830.2 5875,2775.2 R18.2
NetR19_2: R19.2 R22.1 | length 173.2
  1-Top w10: R22.1 5961,2425.76 5961,2489.5 5969,2497.5 R19.2
V3P3: C29.1 C30.2 C31.2 L4.2 P1.7 R19.1 R20.1 U2.19 | length 2465.5
  1-Top w10: U2.19 5734.06,2843.46 5800,2777.52 C31.2 5805.95,2726.53 5818.47,2726.53 5840,2705 5840,2625 5856.86,2608.14 v1(5913.36,2608.14) 5969,2552.5 R19.1 5967,2544.5 5953,2544.5 5906,2497.5 R20.1
  1-Top w80: P1.7 5972.87,3937.13 6050,3860 v3(6050,3800)
  4-Bottom w10: v1(5913.36,2608.14) 5913.36,2727.3 5965,2778.94 5965,3615 v3(6050,3700)
  other v3: 6000,3750
V3P3_EN: R15.1 U2.20 | length 313.8
  1-Top w10: U2.20 5759.65,2845.35 v1(5840,2765) ; v1(5915,2765) 5915,2701.5 5944,2672.5 R15.1
  4-Bottom w10: v1(5840,2765) v1(5915,2765)
V5P0: C24.1 C25.2 C26.2 L3.2 P1.6 R10.1 R11.1 U2.13 | length 1774.9
  1-Top w10: R10.1@5378,2549.5 5383,2544.5 5397,2544.5 5444,2497.5 R11.1 ; R10.1@5381,2552.5 R10.1 5375.3,2552.5 5383.3,2560.5 5383.3,2574.64 v1(5462.22,2653.56) 5541.14,2732.48 5558.86,2732.48 5564.81,2738.43 5564.81,2792.33 5615.94,2843.46 U2.13
  1-Top w80: P1.6 5269.61,3830.39 v3(5300,3800)
  4-Bottom w10: v3(5300,3700) 5382.07,3617.93 5382.07,2733.72 v1(5462.22,2653.56)
  other v3: 5350,3750
V5P0_EN: R16.1 U2.12 | length 293
  1-Top w10: R16.1 5381,2672.5 5567.06,2858.56 5588.88,2858.56 U2.12
V5P0_SERVO: C1.2 C2.2 C3.1 C4.1 C14.2 L1.2 L2.2 P1.4 P1.5 R7.1 R8.1 U1.13 | length 1529.9
  1-Top w10: R8.1 4189,2527.5 4181,2535.5 4181,2542.5 4141,2582.5 R7.1 v1(4135,2645) 4135,2701.34 4186.14,2752.48 C14.2 4203.86,2752.48 4269.08,2817.7 4324.57,2817.7 4340.87,2834 U1.13 U1.13
  1-Top w80: P1.4 5120,3937.13 P1.5
  4-Bottom w10: v1(4135,2645) 4267.5,2777.5 4267.5,2858.67 4400,2991.17 v1(4400,3480)
  other v3: 4350,3530 4450,3530 4400,3580 4350,3630 4450,3630
V5P0_Servo_EN: R1.1 U1.12 | length 481.4
  1-Top w10: R1.1 3904.96,2895 4245,2895 4279.96,2860.04 U1.12
VCC_BATT_FILT: C7.1 C8.1 C9.1 C10.1 C11.1 C12.1 C18.1 C19.1 C20.1 C21.1 C22.1 C23.1 P1.1 P1.2 P1.3 R1.2 R15.2 R16.2 U1.1 U1.7 U1.20 U2.1 U2.7 | length 1023.8
  1-Top w10: U1.20 4486.73,2860.04 4521.77,2825 v1(4525,2825) ; R16.2 5381,2727.5 5389,2735.5 5389,2825.72 5418.75,2855.47 5418.75,2939.62 5463.19,2984.06 C19.1 ; R15.2 5950,2958.66 5981.3,2989.96 C22.1
  4-Bottom w10: v1(4525,2825) 4525,2900 4537.5,2912.5 4687.5,2912.5 v3(4710,2935) v1(4775,3000)
  other v3: 3964.26,2935 4091.32,2935 4835,2935 5225.66,2935 5350.66,2935 6000.66,2935 6125.66,2935
VREG1_VCC: C28.1 R12.1 R21.2 U2.15 | length 533.8
  1-Top w10: R12.1 5631,2497.5 5676.75,2543.25 ; C28.1 C28.1@5631,2727.5 ; U2.15 5655.31,2751.82 C28.1@5631,2727.5 ; R21.2 5749.36,2498.14 5721.86,2498.14 5676.75,2543.25 ; C28.1@5631,2727.5 5676.75,2681.75 5676.75,2543.25
VREG_FB1: R11.2 R12.2 R13.2 R14.1 U2.14 | length 636.5
  1-Top w10: R11.2 R14.1 5562.5,2552.5 ; R13.2 5562.5,2419.59 5562.5,2552.5 ; U2.14 5635.63,2781.44 5590,2735.81 5590,2560.5 5598,2552.5 R12.2 5562.5,2552.5
VREG_FB2: R20.2 R21.1 R22.2 R23.2 U2.18 | length 637.5
  1-Top w10: U2.18 5714.37,2775.09 5760,2729.46 5760,2560.5 5752,2552.5 R21.1 5790,2552.5 ; R22.2 5790,2422.09 5790,2552.5 ; R20.2 5790,2552.5
VREG_PGOOD1: U2.11
VREG_PGOOD2: U2.22
VSERV_FB1: R5.2 R6.2 R8.2 R9.1 U1.14 | length 539.7
  1-Top w10: R8.2 R9.1 ; R5.2 4249,2747.5 4226,2724.5 4226,2672 4255,2643 R9.1 ; R5.2@4261,2747.5 4310.2,2796.7 4310.2,2796.84 4316.06,2802.7 4332.7,2802.7 4360.63,2830.63 U1.14 ; R6.2 4367.05,2545.1 4342.52,2569.63 4340.55,2569.63 4327.68,2582.5 R9.1
VSERV_P_SYNC: U1.22
VSERV_PGOOD: U1.11
VSERV_SS: C15.1 U1.18 | length 103.5
  1-Top w10: C15.1 4439.37,2756.85 U1.18
VSERV_VCC: C16.1 R5.1 U1.15 | length 221.5
  1-Top w10: R5.1 4261,2692.5 4269,2700.5 4269,2706.5 4301,2738.5 4301,2739.5 4309,2747.5 4316.64,2747.5 4324.64,2755.5 4324.64,2769.64 4380.31,2825.32 U1.15
pads on no net: P1. U1.8 U1.24 U2.8 U2.24

## Polygon pours and split planes (outlines as drawn)
GND on 1-Top "GND_L01_P020" (solid, remove dead copper, pour order 20): 3760,2325 3760,4395 cw(c3800,4395) 3800,4435 6370,4435 cw(c6370,4395) 6410,4395 6410,2325 cw(c6370,2325) 6370,2285 3800,2285 cw(c3800,2325)
V5P0_SERVO on 1-Top "V5P0_SERVO_L01_P016" (solid, pour order 16): 4125,3450 4295,3280 5090,3280 5220,3410 5220,3950 5190,3980 5055,3980 5025,3950 5025,3865 4930,3770 4930,3610 4880,3560 4730,3560 4700,3590 4125,3590
V3P3 on 1-Top "V3P3_L01_P015" (solid, pour order 15): 5825,3825 5825,3475 6025,3475 6075,3525 6075,3825
V5P0 on 1-Top "V5P0_L01_P014" (solid, pour order 14): 5525,3825 5525,3475 5325,3475 5275,3525 5275,3825
NetC27_2 on 1-Top "NETC27_2_L01_P013" (solid, pour order 13): 5695,2980 5700,2975 5710,2975 5715,2980 5715,3040 5730,3055 5730,3100 5765,3135 5965,3135 5965,3265 5835,3265 5705,3135 5705,3065 5695,3055
NetC17_2 on 1-Top "NETC17_2_L01_P012" (solid, pour order 12): 5655,2980 5650,2975 5640,2975 5635,2980 5635,3040 5620,3055 5620,3100 5585,3135 5385,3135 5385,3265 5515,3265 5645,3135 5645,3065 5655,3055
VCC_BATT_FILT on 1-Top "VCC_BATT_FILT_L01_P011" (solid, pour order 11): 6175,2890 6175,3015 6165,3025 5765.16,3025 5749.8,3009.65 5749.8,2982.09 5751.77,2980.12 5765.55,2980.12 5855.67,2890
VCC_BATT_FILT on 1-Top "VCC_BATT_FILT_L01_P010" (solid, pour order 10): 5584.45,2980.12 5598.23,2980.12 5600.2,2982.09 5600.2,3009.65 5584.84,3025 5155,3025 5155,2885 5489.33,2885
VCC_BATT_FILT on 1-Top "VCC_BATT_FILT_L01_P009" (solid, pour order 9): 4865,2900 4900,2935 4900,3015 4890,3025 4490.16,3025 4474.8,3009.65 4474.8,2982.09 4476.77,2980.12 4490.55,2980.12 4570.67,2900
VCC_BATT_FILT on 1-Top "VCC_BATT_FILT_L01_P008" (solid, pour order 8): 4309.45,2980.12 4323.23,2980.12 4325.2,2982.09 4325.2,3009.65 4309.84,3025 3845,3025 3835,3015 3835,2970 3895,2910 4239.33,2910
NetC6_2 on 1-Top "NETC6_2_L01_P007" (solid, pour order 7): 4420,2985 4425,2980 4435,2980 4440,2985 4440,3035 4460,3055 4480,3055 4505,3080 4505,3090 4530,3115 4690,3115 4695,3120 4695,3235 4690,3240 4560,3240 4525,3205 4525,3170 4455,3100 4420,3065 4420,2995
NetC5_2 on 1-Top "NETC5_2_L01_P006" (solid, pour order 6): 4380,2985 4375,2980 4365,2980 4360,2985 4360,3035 4340,3055 4320,3055 4295,3080 4295,3090 4270,3115 4110,3115 4105,3120 4105,3235 4110,3240 4240,3240 4275,3205 4275,3170 4345,3100 4380,3065 4380,2995
V5P0_SERVO on 1-Top "V5P0_SERVO_L01_P005" (solid, pour order 5): 4100,3475 4125,3450 4675,3450 4700,3475 4700,3775 4675,3800 4125,3800 4100,3775
GND on 4-Bottom "GND_L04_P019" (solid, remove dead copper, pour order 19): 3760,2325 3760,4395 cw(c3800,4395) 3800,4435 6370,4435 cw(c6370,4395) 6410,4395 6410,2325 cw(c6370,2325) 6370,2285 3800,2285 cw(c3800,2325)
VCC_BATT_FILT on 4-Bottom "VCC_BATT_FILT_L04_P018" (solid, pour order 18): 5435,3885 5490,3940 6115,3940 6180,3875 6180,2915 6150,2885 3925,2885 3900,2910 3900,3065 4195,3360 4195,3625 4560,3990 4970,3990 5020,3940 5020,3910 5045,3885
GND on 2-GND1 (split plane): 6373.9,4414.61 6377.65,4413.47 6381.11,4411.63 6384.14,4409.14 6386.63,4406.11 6388.47,4402.65 6389.61,4398.9 6389.95,4395.47 6389.9,4395 6389.9,2325 6389.95,2324.53 6389.61,2321.1 6388.47,2317.35 6386.63,2313.89 6384.14,2310.86 6381.11,2308.37 6377.65,2306.53 6373.9,2305.39 6370.47,2305.05 6370,2305.1 3800,2305.1 3799.53,2305.05 3796.1,2305.39 3792.35,2306.53 3788.89,2308.37 3785.86,2310.86 3783.37,2313.89 3781.53,2317.35 3780.39,2321.1 3780.05,2324.53 3780.1,2325 3780.1,4395 3780.05,4395.47 3780.39,4398.9 3781.53,4402.65 3783.37,4406.11 3785.86,4409.14 3788.89,4411.63 3792.35,4413.47 3796.1,4414.61 3799.53,4414.95 3800,4414.9 6370,4414.9 6370.47,4414.95
GND on 3-GND2 (split plane): 6373.9,4414.61 6377.65,4413.47 6381.11,4411.63 6384.14,4409.14 6386.63,4406.11 6388.47,4402.65 6389.61,4398.9 6389.95,4395.47 6389.9,4395 6389.9,2325 6389.95,2324.53 6389.61,2321.1 6388.47,2317.35 6386.63,2313.89 6384.14,2310.86 6381.11,2308.37 6377.65,2306.53 6373.9,2305.39 6370.47,2305.05 6370,2305.1 3800,2305.1 3799.53,2305.05 3796.1,2305.39 3792.35,2306.53 3788.89,2308.37 3785.86,2310.86 3783.37,2313.89 3781.53,2317.35 3780.39,2321.1 3780.05,2324.53 3780.1,2325 3780.1,4395 3780.05,4395.47 3780.39,4398.9 3781.53,4402.65 3783.37,4406.11 3785.86,4409.14 3788.89,4411.63 3792.35,4413.47 3796.1,4414.61 3799.53,4414.95 3800,4414.9 6370,4414.9 6370.47,4414.95

## Other copper
1-Top:
  text "Rylan Morgan" at 3784.88,4379.25 h60

## Silkscreen, mask and mechanical layers (free items; w line width, h text height)
Top Overlay:
  text "(V3P3) 6A" at 5417.72,3927.5 h40
  text "_____VIN_____" at 4745.77,3862.05 h40
  text "(V5P0) 12A" at 5022.79,3862.5 h40
  text "(V5P0) 6A" at 5212.72,3862.5 h40
  text "R_DIV" at 5805,2572.05 h40
  text "Place R9 (0Ohm) for V3P3 / Place R8 + R9 to select voltage / Place R5 (10K) for V5P0 / Place R6 + R7 for variable voltage" at 4610,2346.85 h40
  text "Place R14 (0Ohm) for V3P3 / Place R11 + R14 to select voltage / Place R12 (10K) for V5P0 / Place R10 + R13 for variable voltage" at 5030,2315 h40
  text "Place R23 (0Ohm) for V3P3 / Place R23 + R20 to select voltage / Place R21 (10K) for V5P0 / Place R19 + R22 for variable voltage" at 6015,2315 h40
Top Solder:
  text "Rylan Morgan" at 3784.88,4379.25 h60
Mechanical 15:
  the board outline again, w10